# Altium PCB attenuator-pcb - 3.PcbDoc
Units mm, origin at the board's own origin, x right, y up, seen from the top; angles counter-clockwise.
Board outline 38.59 x 14.96 mm, 2 copper layers (Top Layer, Bottom Layer), stack 1.56 mm thick; 6 components, 37 nets, 18 pads, 27 vias.
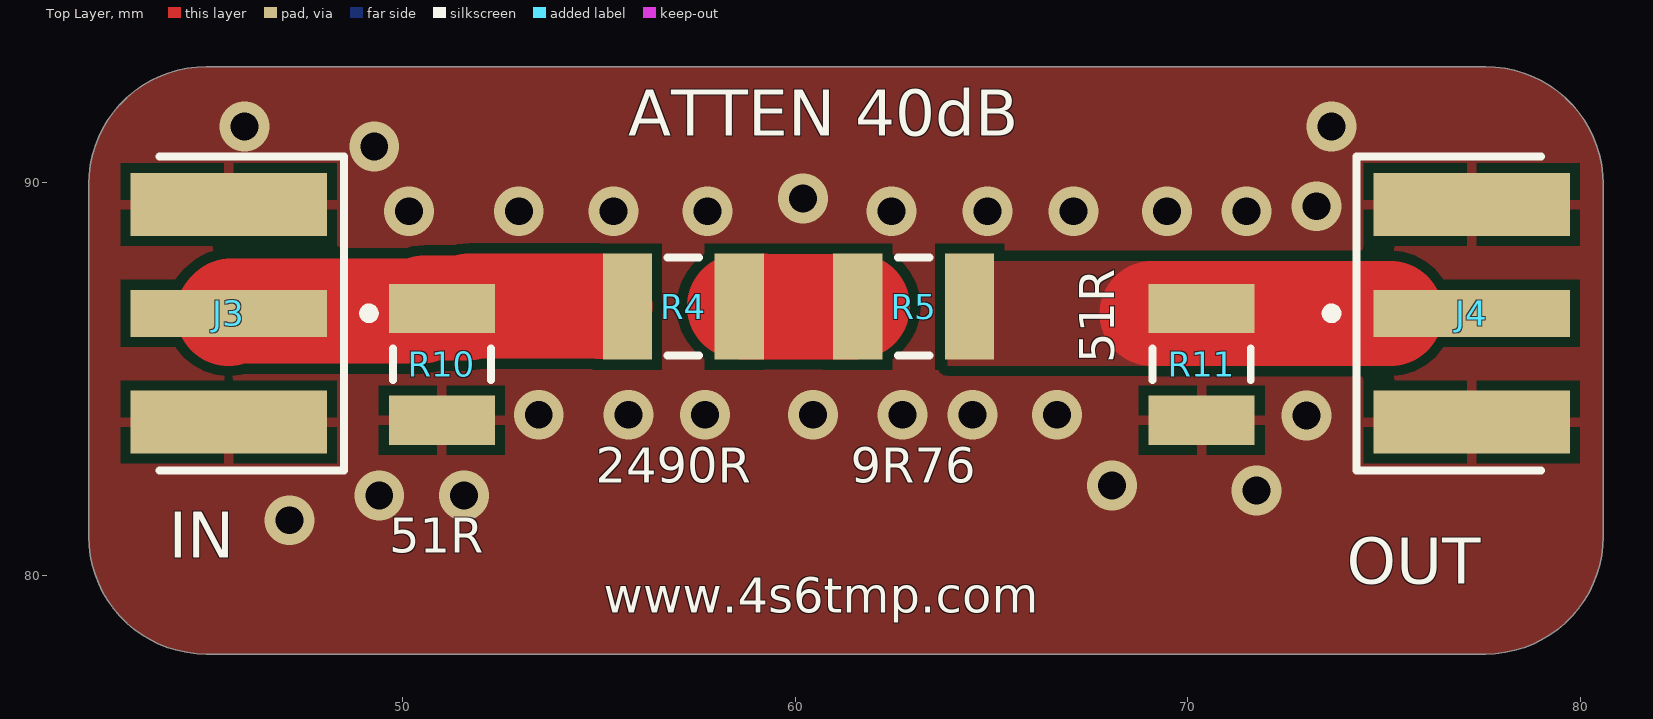
[diagram p0: Top Layer view]
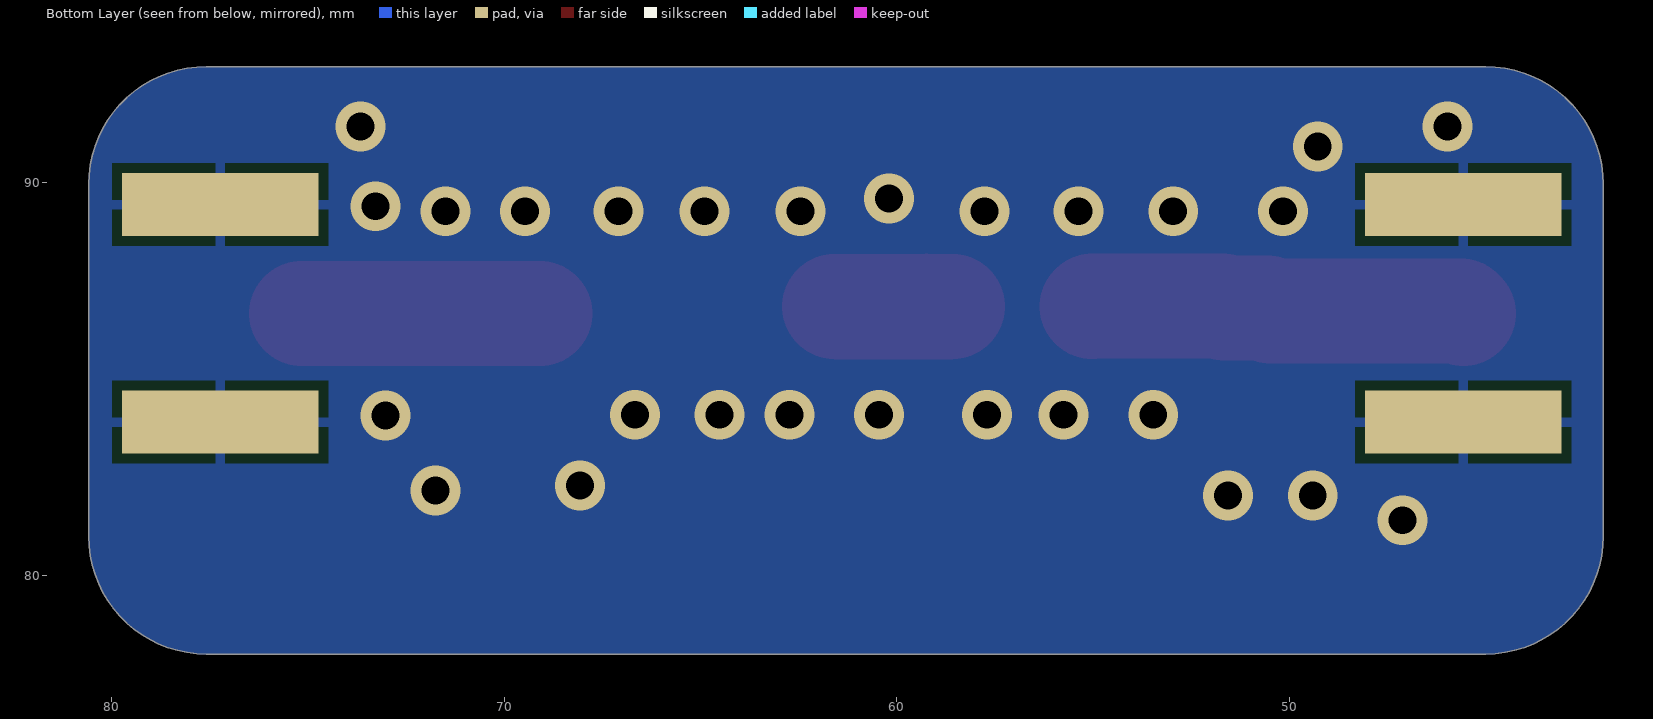
[diagram p1: Bottom Layer view, seen from below]

## Layer stack, top to bottom
Top Solder: solder mask 0.0203, Solder Resist, Dk 3.8
Top Layer: signal copper 0.035
Prepreg 7628: dielectric 1.49, FR-4, Dk 4.6
Bottom Layer: signal copper 0.035
Bottom Solder: solder mask 0.0203, Solder Resist, Dk 3.8

## Board outline
42,81 42,89.964 cw(c45,89.964) 45,92.964 77.59,92.964 cw(c77.59,89.964) 80.59,89.964 80.59,81 cw(c77.59,81) 77.59,78 45,78 cw(c45,81)

## Design rules (kind name [scope] priority, off if disabled: settings)
Clearance [All] p1: gap=0.254 ignorepadtopadclearanceinfootprint=FALSE except(0: Arc-Hole Track-Hole SMDPad-Hole THPad-Hole Via-Hole Fill-Hole Poly-Hole Region-Hole Text-Hole)
HoleToHoleClearance [All] p1: gap=0.1 allowstackedmicrovias=TRUE
MinimumSolderMaskSliver [All] p1 off: minsoldermaskwidth=0.1
PolygonConnect [All] p1: connectstyle=Relief reliefconductorwidth=0.254 reliefentries=4 polygonreliefangle="90 Angle" airgapwidth=0.254
RoomDefinition schematic [InComponentClass('schematic')] p1: confinementstyle=ConfineIn formatcopy=TRUE lockcomponents=FALSE outline 32.639,72.898 90.17,72.898 90.17,93.345 32.639,93.345
RoutingVias [All] p1: holewidth=0.711 width=1.27 viastyle="Through Hole" minholewidth=0.711 minwidth=1.27 maxholewidth=0.711 maxwidth=1.27
SilkToSolderMaskClearance [IsPad] p1: minsilkscreentomaskgap=0.1 clearancetoexposedcopper=TRUE
SolderMaskExpansion [All] p1: expansion=0.102 istentingtop=FALSE
Width [All] p1: maxlimit=3 minlimit=1.5 preferedwidth=2.673 impedanceprofiledriven=TRUE impedanceprofileid={88FF0C83-8680-40BB-AEE6-F79FA2882ED4} impedanceprofilevalue=50.000000 minimp=50.000000 maximp=50.000000 favimp=50.000000
Width Width_1 [All] p2: maxlimit=2 minlimit=0.254 preferedwidth=1 minimp=50.000000 maximp=50.000000 favimp=50.000000
27 further rules are at their usual default settings.

## Components (designator, comment, footprint, x,y, rotation, side; value= is the part's Value field where it differs from the comment)
J3 "IN" FP-CON-SMA-EDGE-S-MFG 38.307,86.679 r90 top
J4 "OUT" FP-CON-SMA-EDGE-S-MFG 84.5,86.679 r270 top
R4 "2490R" RESC3225X70X50NL20T20 57.15,86.851 r0 top
R5 "9R76" RESC3225X70X50NL20T20 63.02,86.851 r0 top
R10 "51R" RESC3225X70X50NL20T20 51,85.381 r90 top
R11 "51R" RESC3225X70X50NL20T20 70.358,85.381 r90 top

## Footprints (in the part's own frame and the unit in brackets; to place one, negate y for a bottom-side part, rotate by r counter-clockwise, add the part's x,y. Pads: shape width x height; smd on the part's side, far side on the other; paste and mask are expansions set on the pad)
FP-CON-SMA-EDGE-S-MFG [mm]
  rect 1.2x5 smd paste+0 mask+0: 1(0,-7.26)
  rect 1.6x5 smd paste+0 mask+0: 2(-2.77,-7.26) 3(2.77,-7.26)
  rect 1.6x5 smd far side paste+0 mask+0: 4(-2.77,-7.26) 5(2.77,-7.26)
  silkscreen extent -4,-10.96 4,-5.5, body extent -3.67,-9.86 3.67,4.86, height 0.25
RESC3225X70X50NL20T20 [mm] "Chip Resistor, 2-Leads, Body 3.20x2.50mm, IPC Medium Density"
  rect 1.25x2.7 smd: 1(-1.425,0) 2(1.425,0)
  silkscreen extent -0.4,-1.25 0.4,1.25, body extent -1.7,-1.35 1.7,1.35, height 0.7

## Part data
J3 J4: library part CMP-204357-000001-1, "CONN SMA JACK STR EDGE MNT", Frequency=18GHz, Manufacturer="RF Solutions Ltd.", Manufacturer Part Number=CON-SMA-EDGE-S, Package=CONN_JACK, Automotive=No, Category=Conn, ComponentLink2Description=Datasheet, ComponentLink2URL=https://www.rfsolutions.co.uk/downloads/1498648656DS-CON-EDGE-SMA-4.pdf, Conn Orientation="Right Angle", Contact Material=Gold, Device Class L1=Connectors, Device Class L2="RF / Coaxial Connectors", Device Class L3=unset, Digikey Description="CONN SMA JACK STR EDGE MNT", Footprint Url=https://forum.upverter.com/uploads/default/original/3X/b/e/be75b907af57498775929d6d9099689c472e0307.pdf, Height=6.35mm, Impedance=50Ω, Is Female=yes, Lead Free=Yes, Number Of Contacts=1, Octopart=https://octopart.com/con-sma-edge-s-rf+solutions-70967450, RoHS=TRUE, Shielding=true
R4 R5 R10 R11: library part CMP-2005-01957-1, Manufacturer=Panasonic, Part Number=ERJ-14NF1001U

## Via types
v1: diameter 1.27, hole 0.711, Top Layer to Bottom Layer, 27 vias

## Nets (pads, with @x,y where several pads share a name; then routed paths per layer and width w, separated by ;. In a path a pad name is that pad's centre, name@x,y a point inside that pad or via, vN(x,y) a via of type N, cw(c..) or ccw(c..) an arc to the next point about the centre after c; other vN are vias at no path point)
GND: J3.2 J3.3 J3.4 J3.5 J4.2 J4.3 J4.4 J4.5 R10.1 R11.1
  other v1: 47.117,81.407 49.403,82.042 51.562,82.042 71.755,82.169 68.072,82.296 73.025,84.074 53.467,84.096 55.753,84.096 57.705,84.096 60.452,84.096 62.738,84.096 64.516,84.096 66.675,84.096 50.165,89.281 52.959,89.281 55.372,89.281 57.764,89.281 62.452,89.281 64.897,89.281 67.09,89.281 69.469,89.281 71.501,89.281 73.279,89.408 60.198,89.601 49.276,90.932 45.974,91.44 73.66,91.44
NetJ1_1: 
NetJ2_1: 
NetJ3_1: J3.1 R4.1 R10.2 | length 9.5
  Top Layer w2.673: J3.1 45.628,86.741 50.481,86.741 R10.2@50.546,86.806 ; R10.2@50.56,86.819 51.651,86.819 51.699,86.868 55.01,86.868 55.027,86.851
NetJ4_1: J4.1 R5.2 R11.2 | length 6.1
  Top Layer w2.673: R11.2@69.088,86.679 J4.1@75.163,86.679
NetJ5_1: 
NetJ6_1: 
NetJ7_1: 
NetJ8_1: 
NetJ9_1: 
NetJ10_1: 
NetJ11_1: 
NetJ12_1: 
NetR1_2: 
NetR2_2: 
NetR4_2: R4.2 R5.1 | length 3
  Top Layer w2.673: R4.2 R5.1
NetR6_1: 
NetR7_1: 
NetR12_2: 
NetR13_2: 
NetR15_2: 
NetR17_2: 
NetR18_2: 
NetR20_1: 
NetR21_1: 
NetR22_1: 
NetR23_1: 
NetR24_1: 
NetR25_1: 
NetR30_2: 
NetR32_2: 
NetR34_1: 
NetR35_1: 
NetR36_1: 
NetR37_1: 
NetR38_1: 
NetR39_1: 

## Polygon pours and split planes (outlines as drawn)
GND on Top Layer "Top Layer-No Net" (solid, pour order 11): 42,81 42,89.964 cw(c45,89.964) 45,92.964 77.59,92.964 cw(c77.59,89.964) 80.59,89.964 80.59,81 cw(c77.59,81) 77.59,78 45,78 cw(c45,81)
NetJ4_1 on Top Layer "NETJ4_1_L01_P005" (solid, remove dead copper, pour order 5): 63.881,88.011 72.136,88.011 72.136,85.344 63.881,85.344
GND on Bottom Layer "Top Layer-GND" (solid, pour order 12): 42,81 42,89.964 cw(c45,89.964) 45,92.964 77.59,92.964 cw(c77.59,89.964) 80.59,89.964 80.59,81 cw(c77.59,81) 77.59,78 45,78 cw(c45,81)

## Silkscreen, mask and mechanical layers (free items; w line width, h text height)
Top Overlay:
  text "ATTEN 40dB" at 55.745,90.819 h2
  text "www.4s6tmp.com" at 55.118,78.757 h1.52
Mechanical 1:
  the board outline again, w0.254